# Altium PCB iso_simucam.PcbDoc (part 4 of 4)
Units mil, origin at the board's own origin, x right, y up, seen from the top; angles counter-clockwise.
Board outline 2600 x 5120 mil, 2 copper layers (Top Layer, Bottom Layer); 384 components, 206 nets, 1336 pads, 508 vias.
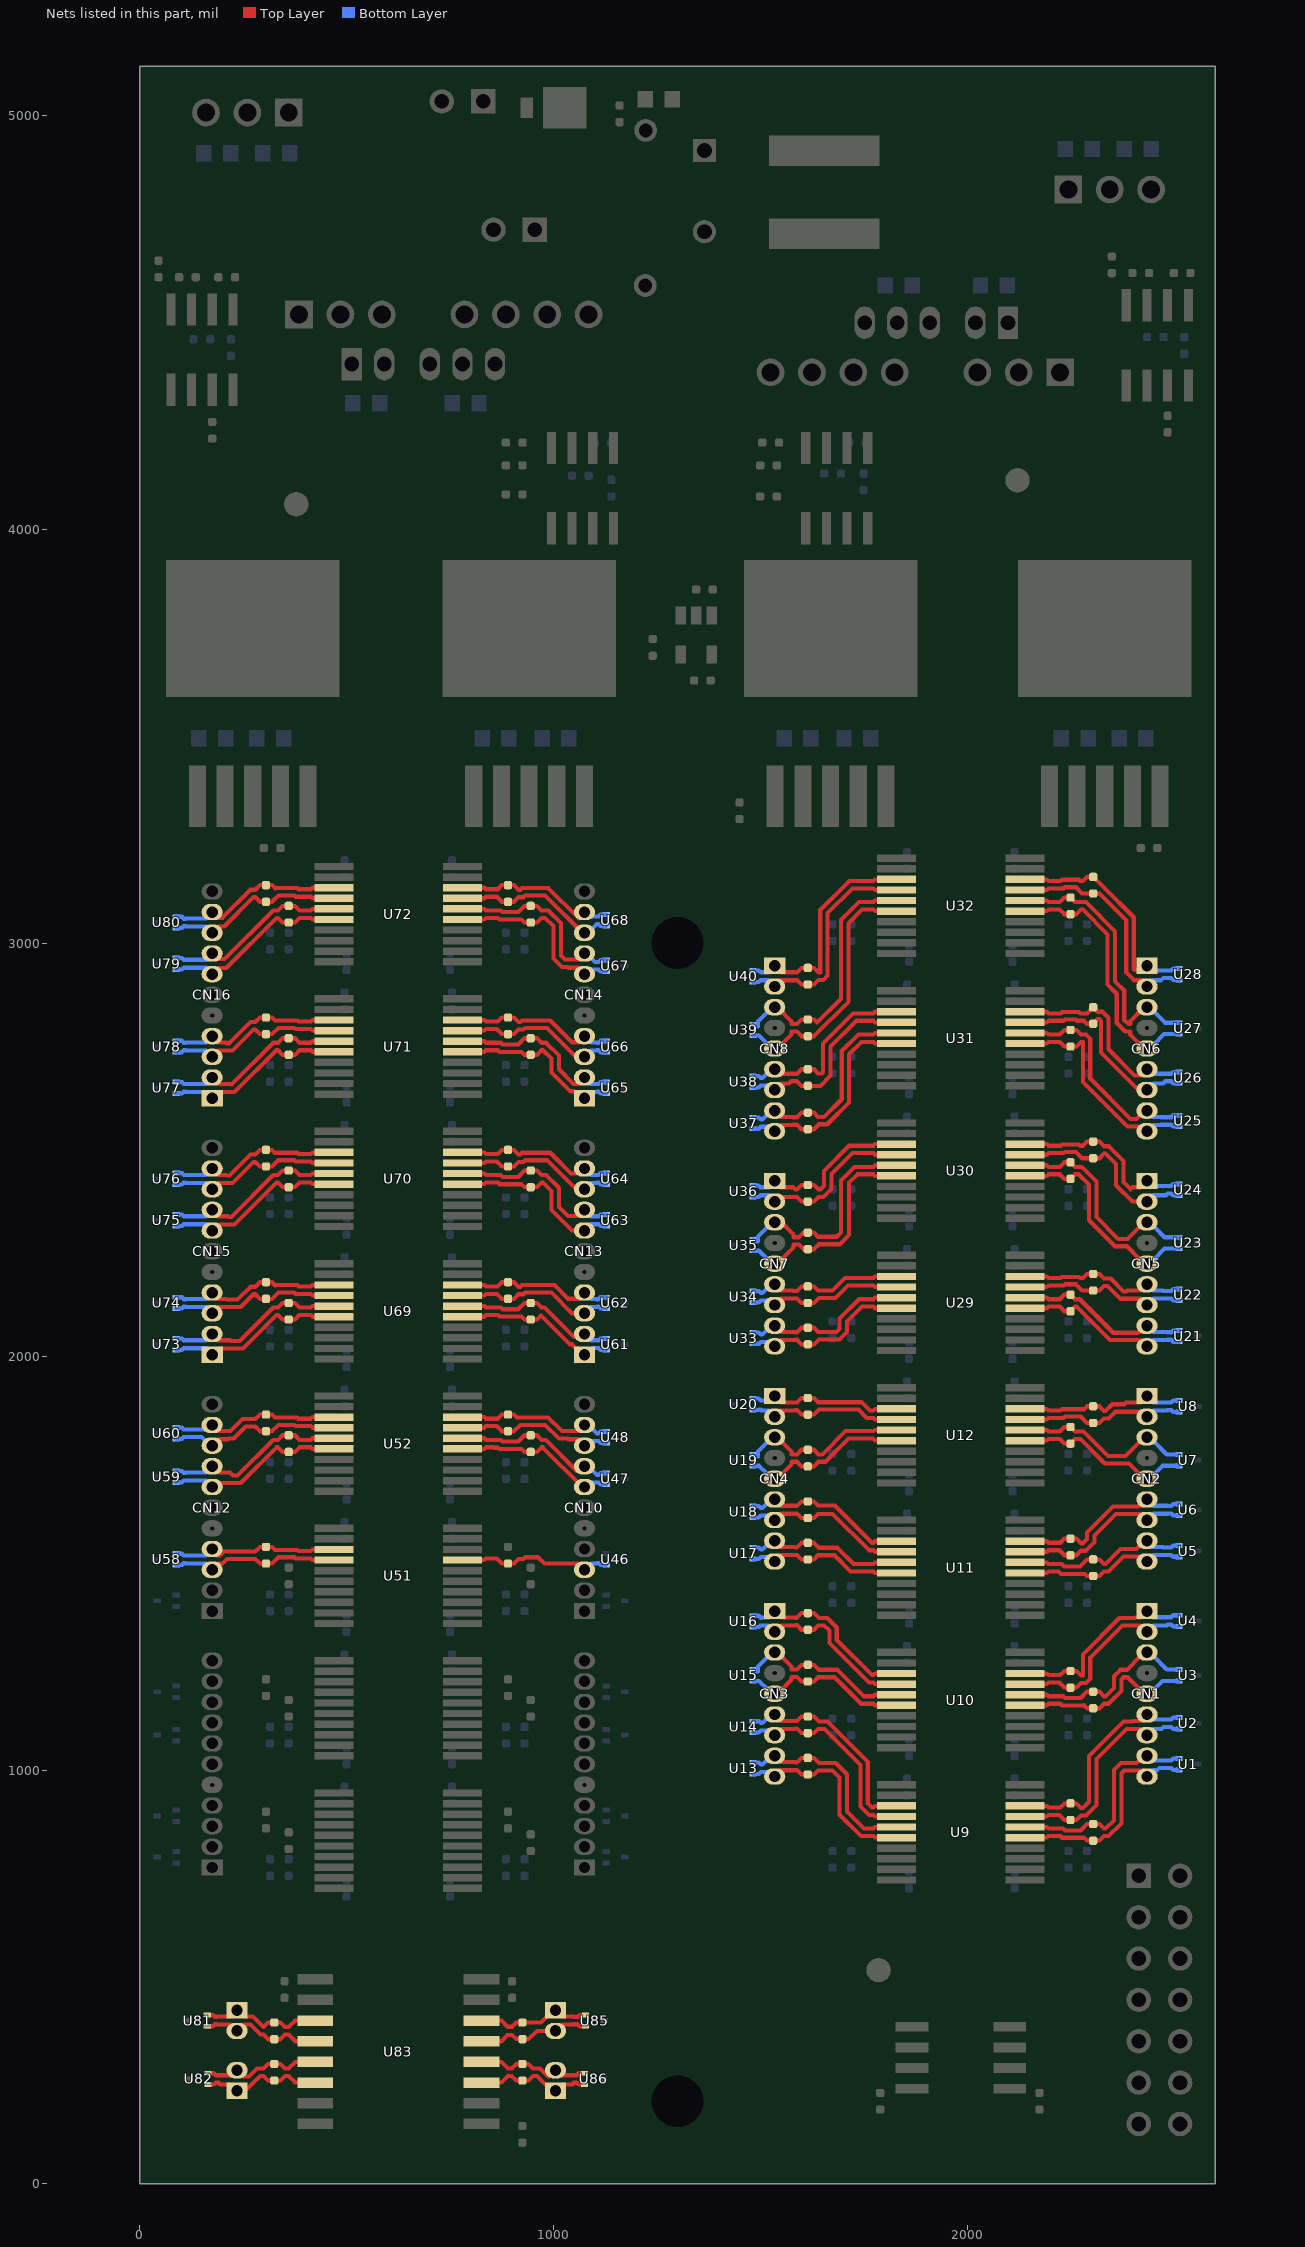
[diagram p4: the nets of this part, all layers, seen from the top]

## Via types
v1: diameter 30, hole 15, Top Layer to Bottom Layer, tented both sides, 508 vias

## Nets (pads, with @x,y where several pads share a name; then routed paths per layer and width w, separated by ;. In a path a pad name is that pad's centre, name@x,y a point inside that pad or via, vN(x,y) a via of type N, cw(c..) or ccw(c..) an arc to the next point about the centre after c; other vN are vias at no path point) (continued)
RX6_ISO_P: CN10.3 R38.2 U46.1 U51.7 | length 380.9
  Top Layer w10: U51.7@780.51,1508.39 832.76,1508.39 836.55,1512.18 862.9,1512.18 875.16,1499.92 R38.2@890,1499.92 904.84,1499.92 915.92,1511 927.71,1511 931.83,1515.12 963.09,1515.12 978.21,1500 1060,1500 CN10.3@1075,1485
  Bottom Layer w10: CN10.3@1075,1485 1090.32,1500.32 1104.32,1500.32 1105,1501 1108.72,1501 1113.5,1496.22 U46.1@1127.36,1496.22
RX6_N: CN12.4 R46.1 U51.13 U58.1 | length 413
  Top Layer w10: CN12.4@175,1535 187.27,1522.73 187.27,1519.68 194.23,1519.68 203.54,1529 279.08,1529 290.16,1540.08 R46.1@305,1540.08 319.84,1540.08 327.19,1532.73 327.58,1533.12 380.63,1533.12 383.57,1530.18 413.45,1530.18 417.24,1533.98 U51.13@469.49,1533.98
  Bottom Layer w10: U58.1@87.64,1523.78 101.5,1523.78 106.28,1519 110,1519 110.68,1519.68 159.68,1519.68 CN12.4@175,1535
RX6_P: CN12.3 R46.2 U51.14 U58.2 | length 419.9
  Top Layer w10: CN12.3@179.96,1485 CN12.3@175,1485 190,1500 200,1500 211,1511 279.08,1511 290.16,1499.92 R46.2@305,1499.92 319.84,1499.92 335.04,1515.12 373.17,1515.12 376.11,1512.18 413.45,1512.18 417.24,1508.39 U51.14@469.49,1508.39
  Bottom Layer w10: U58.2@87.64,1496.22 101.5,1496.22 106.28,1501 110,1501 110.68,1500.32 159.68,1500.32 CN12.3@175,1485
RX7_ISO_N: CN10.8 R39.1 U47.2 U52.6 | length 422.3
  Top Layer w10: U52.6@780.51,1802.8 832.76,1802.8 836.55,1799 872.71,1799 876.83,1794.88 914.96,1794.88 930.16,1810.08 R39.1@945,1810.08 959.84,1810.08 970.92,1799 981.5,1799 1056.25,1724.25 1064.25,1724.25 CN10.8@1075,1735
  Bottom Layer w10: CN10.8@1064.25,1724.25 CN10.8@1075,1735 1084,1735 1105,1714 1108.72,1714 1113.5,1718.78 U47.2@1127.36,1718.78
RX7_ISO_P: CN10.7 R39.2 U47.1 U52.5 | length 403.9
  Top Layer w10: U52.5@780.51,1777.2 832.76,1777.2 836.55,1781 855,1781 856,1780 866.25,1780 869.37,1776.88 923.2,1776.88 930.16,1769.92 R39.2@945,1769.92 959.84,1769.92 970.92,1781 974.04,1781 1070.04,1685 CN10.7@1075,1685
  Bottom Layer w10: CN10.7@1075,1685 1086,1696 1108.72,1696 1113.5,1691.22 U47.1@1127.36,1691.22
RX7_N: CN12.8 R47.1 U52.15 U59.1 | length 445.9
  Top Layer w10: CN12.8@175,1735 190.32,1719.68 218.32,1719.68 225,1713 236.54,1713 322.54,1799 334.08,1799 345.16,1810.08 R47.1@360,1810.08 374.84,1810.08 385.92,1799 413.45,1799 417.24,1802.8 U52.15@469.49,1802.8
  Bottom Layer w10: U59.1@87.64,1723.78 101.5,1723.78 106.28,1719 110,1719 110.68,1719.68 159.68,1719.68 CN12.8@175,1735
RX7_P: CN12.7 R47.2 U52.16 U59.2 | length 441
  Top Layer w10: CN12.7@175,1685 185,1695 244,1695 330,1781 334.08,1781 345.16,1769.92 R47.2@360,1769.92 374.84,1769.92 385.92,1781 413.45,1781 417.24,1777.2 U52.16@469.49,1777.2
  Bottom Layer w10: U59.2@87.64,1696.22 101.5,1696.22 106.28,1701 110,1701 110.68,1700.32 159.68,1700.32 CN12.7@175,1685
RX8_ISO_N: CN10.10 R40.1 U48.2 U52.8 | length 386
  Top Layer w10: U52.8@780.51,1853.98 832.76,1853.98 836.55,1850.18 865.26,1850.18 875.16,1860.08 R40.1@890,1860.08 904.84,1860.08 911.8,1853.12 987.34,1853.12 1020.46,1820 1060,1820 CN10.10@1075,1835
  Bottom Layer w10: CN10.10@1075,1835 1084,1835 1105,1814 1108.72,1814 1113.5,1818.78 U48.2@1127.36,1818.78
RX8_ISO_P: CN10.9 R40.2 U48.1 U52.7 | length 387.1
  Top Layer w10: U52.7@780.51,1828.39 832.76,1828.39 836.55,1832.18 862.9,1832.18 875.16,1819.92 R40.2@890,1819.92 904.84,1819.92 920.04,1835.12 979.88,1835.12 1013,1802 1035,1802 1036.68,1800.32 1059.68,1800.32 CN10.9@1075,1785
  Bottom Layer w10: CN10.9@1075,1785 1086,1796 1108.72,1796 1113.5,1791.22 U48.1@1127.36,1791.22
RX8_N: CN12.10 R48.1 U52.13 U60.1 | length 417.2
  Top Layer w10: CN12.10@175,1835 190,1820 219.54,1820 248.54,1849 279.08,1849 290.16,1860.08 R48.1@305,1860.08 319.84,1860.08 327.19,1852.73 327.58,1853.12 380.63,1853.12 383.57,1850.18 413.45,1850.18 417.24,1853.98 U52.13@469.49,1853.98
  Bottom Layer w10: U60.1@87.64,1828.78 101.5,1828.78 106.28,1824 164,1824 CN12.10@175,1835
RX8_P: CN12.9 R48.2 U52.14 U60.2 | length 425.3
  Top Layer w10: CN12.9@175,1785 190.32,1800.32 213.32,1800.32 215,1802 227,1802 256,1831 279.08,1831 290.16,1819.92 R48.2@305,1819.92 319.84,1819.92 335.04,1835.12 373.17,1835.12 376.11,1832.18 413.45,1832.18 417.24,1828.39 U52.14@469.49,1828.39
  Bottom Layer w10: U60.2@87.64,1801.22 101.5,1801.22 106.28,1806 149.04,1806 170.04,1785 CN12.9@175,1785
RX9_ISO_N: CN13.2 R49.1 U61.2 U69.6 | length 405.5
  Top Layer w10: U69.6@780.51,2122.36 832.76,2122.36 836.55,2118.57 873.14,2118.57 876.83,2114.88 914.96,2114.88 930.16,2130.08 R49.1@945,2130.08 959.84,2130.08 970.92,2119 978.38,2119 1049.38,2048 1057.46,2048 1062.73,2042.73 CN13.2@1075,2055
  Bottom Layer w10: CN13.2@1075,2055 1090.31,2039.69 1109.41,2039.69 1113.5,2043.78 U61.2@1127.36,2043.78
RX9_ISO_P: CN13.1 R49.2 U61.1 U69.5 | length 401.9
  Top Layer w10: U69.5@780.51,2096.77 832.76,2096.77 836.55,2100.57 865.69,2100.57 869.37,2096.88 923.2,2096.88 930.16,2089.92 R49.2@945,2089.92 959.84,2089.92 969.96,2100.04 1040,2030 ; 1041.92,2030 1045.04,2030 1054.73,2020.32 1059.68,2020.32 CN13.1@1075,2005
  Bottom Layer w10: CN13.1@1077.48,2002.52 1096.3,2021.34 1104.66,2021.34 1105,2021 1108.72,2021 1113.5,2016.22 U61.1@1127.36,2016.22
RX9_N: CN15.2 R57.1 U69.15 U73.1 | length 442
  Top Layer w10: CN15.2@175,2055 190.31,2039.69 218.31,2039.69 220,2038 241.54,2038 322.54,2119 334.08,2119 345.16,2130.08 R57.1@360,2130.08 374.84,2130.08 386.35,2118.57 413.45,2118.57 417.24,2122.36 U69.15@469.49,2122.36
  Bottom Layer w10: U73.1@87.64,2043.78 101.5,2043.78 106.28,2039 110,2039 110.69,2039.69 159.69,2039.69 CN15.2@175,2055
RX9_P: CN15.1 R57.2 U69.16 U73.2 | length 440.8
  Top Layer w10: CN15.1@175,2005 190,2020 249,2020 330,2101 334.08,2101 345.16,2089.92 R57.2@360,2089.92 374.84,2089.92 385.49,2100.57 413.45,2100.57 417.24,2096.77 U69.16@469.49,2096.77
  Bottom Layer w10: U73.2@87.64,2016.22 101.5,2016.22 106.28,2021 110,2021 110.68,2020.32 159.68,2020.32 CN15.1@175,2005
RX10_ISO_N: CN13.4 R50.1 U62.2 U69.8 | length 387.3
  Top Layer w10: U69.8@780.51,2173.54 832.76,2173.54 836.55,2169.75 864.83,2169.75 875.16,2180.08 R50.1@890,2180.08 904.84,2180.08 915.92,2169 920.25,2169 924.37,2173.12 1002.34,2173.12 1035.23,2140.23 1060.23,2140.23 CN13.4@1075,2155
  Bottom Layer w10: CN13.4@1075,2155 1090.32,2139.68 1104.32,2139.68 1105,2139 1108.72,2139 1113.5,2143.78 U62.2@1127.36,2143.78
RX10_ISO_P: CN13.3 R50.2 U62.1 U69.7 | length 389
  Top Layer w10: U69.7@780.51,2147.95 832.76,2147.95 836.55,2151.75 863.33,2151.75 875.16,2139.92 R50.2@890,2139.92 904.84,2139.92 915.92,2151 927.71,2151 931.83,2155.12 994.88,2155.12 1045,2105 CN13.3@1075,2105
  Bottom Layer w10: CN13.3@1075,2105 1090.32,2120.32 1104.32,2120.32 1105,2121 1108.72,2121 1113.5,2116.22 U62.1@1127.36,2116.22
RX10_N: CN15.4 R58.1 U69.13 U74.1 | length 421.1
  Top Layer w10: CN15.4@175,2155 190.32,2139.68 208.32,2139.68 210,2138 236.54,2138 267.54,2169 279.08,2169 290.16,2180.08 R58.1@305,2180.08 319.84,2180.08 327.19,2172.73 327.58,2173.12 380.63,2173.12 384,2169.75 413.45,2169.75 417.24,2173.54 U69.13@469.49,2173.54
  Bottom Layer w10: U74.1@87.64,2143.78 101.5,2143.78 106.28,2139 110,2139 110.68,2139.68 159.68,2139.68 CN15.4@175,2155
RX10_P: CN15.3 R58.2 U69.14 U74.2 | length 423.4
  Top Layer w10: CN15.3@175,2105 190,2120 244,2120 275,2151 279.08,2151 290.16,2139.92 R58.2@305,2139.92 319.84,2139.92 335.04,2155.12 373.17,2155.12 376.54,2151.75 413.45,2151.75 417.24,2147.95 U69.14@469.49,2147.95
  Bottom Layer w10: U74.2@87.64,2116.22 101.5,2116.22 106.28,2121 110,2121 110.68,2120.32 159.68,2120.32 CN15.3@175,2105
RX11_ISO_N: CN13.8 R51.1 U63.2 U70.6 | length 444.1
  Top Layer w10: U70.6@780.51,2442.8 832.76,2442.8 836.55,2439 872.71,2439 876.83,2434.88 914.96,2434.88 930.16,2450.08 R51.1@945,2450.08 959.84,2450.08 970.92,2439 982.46,2439 1013,2408.46 1013,2362 1035,2340 1060,2340 CN13.8@1075,2355
  Bottom Layer w10: CN13.8@1075,2355 1090.32,2339.68 1104.32,2339.68 1105,2339 1108.72,2339 1113.5,2343.78 U63.2@1127.36,2343.78
RX11_ISO_P: CN13.7 R51.2 U63.1 U70.5 | length 441.5
  Top Layer w10: U70.5@780.51,2417.2 832.76,2417.2 836.55,2421 865.25,2421 869.37,2416.88 923.2,2416.88 930.16,2409.92 R51.2@945,2409.92 959.84,2409.92 970.92,2421 975,2421 995,2401 995,2354.54 1044.54,2305 CN13.7@1075,2305
  Bottom Layer w10: CN13.7@1075,2305 1090.32,2320.32 1104.32,2320.32 1105,2321 1108.72,2321 1113.5,2316.22 U63.1@1127.36,2316.22
RX11_N: CN15.8 R59.1 U70.15 U75.1 | length 450.1
  Top Layer w10: CN15.8@175,2355 190.32,2339.68 213.32,2339.68 215,2338 221.54,2338 322.54,2439 334.08,2439 345.16,2450.08 R59.1@360,2450.08 374.84,2450.08 385.92,2439 413.45,2439 417.24,2442.8 U70.15@469.49,2442.8
  Bottom Layer w10: U75.1@87.64,2343.78 101.5,2343.78 106.28,2339 110,2339 110.68,2339.68 159.68,2339.68 CN15.8@175,2355
RX11_P: CN15.7 R59.2 U70.16 U75.2 | length 449.3
  Top Layer w10: CN15.7@175,2305 190,2320 229,2320 330,2421 334.08,2421 345.16,2409.92 R59.2@360,2409.92 374.84,2409.92 385.92,2421 413.45,2421 417.24,2417.2 U70.16@469.49,2417.2
  Bottom Layer w10: U75.2@87.64,2316.22 101.5,2316.22 106.28,2321 110,2321 110.68,2320.32 159.68,2320.32 CN15.7@175,2305
RX12_ISO_N: CN13.10 R52.1 U64.2 U70.8 | length 393.4
  Top Layer w10: U70.8@780.51,2493.98 832.76,2493.98 836.55,2490.18 865.26,2490.18 875.16,2500.08 R52.1@890,2500.08 904.84,2500.08 915.92,2489 920.25,2489 924.37,2493.12 992.34,2493.12 1042.73,2442.73 1062.73,2442.73 CN13.10@1075,2455
  Bottom Layer w10: CN13.10@1075,2455 1090.32,2439.68 1104.32,2439.68 1105,2439 1108.72,2439 1113.5,2443.78 U64.2@1127.36,2443.78
RX12_ISO_P: CN13.9 R52.2 U64.1 U70.7 | length 397.4
  Top Layer w10: U70.7@780.51,2468.39 832.76,2468.39 836.55,2472.18 862.9,2472.18 875.16,2459.92 R52.2@890,2459.92 904.84,2459.92 915.92,2471 927.71,2471 931.83,2475.12 984.88,2475.12 1055,2405 CN13.9@1075,2405
  Bottom Layer w10: CN13.9@1075,2405 1090.32,2420.32 1104.32,2420.32 1105,2421 1108.72,2421 1113.5,2416.22 U64.1@1127.36,2416.22
RX12_N: CN15.10 R60.1 U70.13 U76.1 | length 429.2
  Top Layer w10: CN15.10@175,2455 190.32,2439.68 208.32,2439.68 210,2438 216.54,2438 267.54,2489 279.08,2489 290.16,2500.08 R60.1@305,2500.08 319.84,2500.08 327.19,2492.73 327.58,2493.12 380.63,2493.12 383.57,2490.18 413.45,2490.18 417.24,2493.98 U70.13@469.49,2493.98
  Bottom Layer w10: U76.1@87.64,2443.78 101.5,2443.78 106.28,2439 110,2439 110.68,2439.68 159.68,2439.68 CN15.10@175,2455
RX12_P: CN15.9 R60.2 U70.14 U76.2 | length 431.5
  Top Layer w10: CN15.9@175,2405 190,2420 224,2420 275,2471 279.08,2471 290.16,2459.92 R60.2@305,2459.92 319.84,2459.92 335.04,2475.12 373.17,2475.12 376.11,2472.18 413.45,2472.18 417.24,2468.39 U70.14@469.49,2468.39
  Bottom Layer w10: U76.2@87.64,2416.22 101.5,2416.22 106.28,2421 110,2421 110.68,2420.32 159.68,2420.32 CN15.9@175,2405
RX13_ISO_N: CN14.2 R53.1 U65.2 U71.6 | length 436.1
  Top Layer w10: U71.6@780.51,2762.8 832.76,2762.8 836.55,2759 872.71,2759 876.83,2754.88 914.96,2754.88 930.16,2770.08 R53.1@945,2770.08 959.84,2770.08 970.92,2759 982.46,2759 1013,2728.46 1013,2695 1048.31,2659.69 1059.69,2659.69 CN14.2@1075,2675
  Bottom Layer w10: CN14.2@1075,2675 1090.31,2659.69 1109.41,2659.69 1113.5,2663.78 U65.2@1127.36,2663.78
RX13_ISO_P: CN14.1 R53.2 U65.1 U71.5 | length 433.9
  Top Layer w10: U71.5@780.51,2737.2 832.76,2737.2 836.55,2741 865.25,2741 869.37,2736.88 923.2,2736.88 930.16,2729.92 R53.2@945,2729.92 959.84,2729.92 970.92,2741 975,2741 995,2721 995,2687.54 1040.86,2641.69 1048.31,2641.69 1065,2625 CN14.1@1075,2625
  Bottom Layer w10: CN14.1@1075,2625 1090.32,2640.32 1104.32,2640.32 1105,2641 1108.72,2641 1113.5,2636.22 U65.1@1127.36,2636.22
RX13_N: CN16.2 R61.1 U71.15 U77.1 | length 450.1
  Top Layer w10: CN16.2@175,2675 190.31,2659.69 218.31,2659.69 220,2658 221.54,2658 322.54,2759 334.08,2759 345.16,2770.08 R61.1@360,2770.08 374.84,2770.08 385.92,2759 413.45,2759 417.24,2762.8 U71.15@469.49,2762.8
  Bottom Layer w10: U77.1@87.64,2663.78 101.5,2663.78 106.28,2659 110,2659 110.69,2659.69 159.69,2659.69 CN16.2@175,2675
RX13_P: CN16.1 R61.2 U71.16 U77.2 | length 449.3
  Top Layer w10: CN16.1@175,2625 190,2640 229,2640 330,2741 334.08,2741 345.16,2729.92 R61.2@360,2729.92 374.84,2729.92 385.92,2741 413.45,2741 417.24,2737.2 U71.16@469.49,2737.2
  Bottom Layer w10: U77.2@87.64,2636.22 101.5,2636.22 106.28,2641 110,2641 110.68,2640.32 159.68,2640.32 CN16.1@175,2625
RX14_ISO_N: CN14.4 R54.1 U66.2 U71.8 | length 395.5
  Top Layer w10: U71.8@780.51,2813.98 832.76,2813.98 836.55,2810.18 865.26,2810.18 875.16,2820.08 R54.1@890,2820.08 904.84,2820.08 915.92,2809 920.25,2809 924.37,2813.12 992.34,2813.12 1045.23,2760.23 1060.23,2760.23 CN14.4@1075,2775
  Bottom Layer w10: CN14.4@1075,2775 1090.32,2759.68 1104.32,2759.68 1105,2759 1108.72,2759 1113.5,2763.78 U66.2@1127.36,2763.78
RX14_ISO_P: CN14.3 R54.2 U66.1 U71.7 | length 397.4
  Top Layer w10: U71.7@780.51,2788.39 832.76,2788.39 836.55,2792.18 862.9,2792.18 875.16,2779.92 R54.2@890,2779.92 904.84,2779.92 915.92,2791 927.71,2791 931.83,2795.12 984.88,2795.12 1055,2725 CN14.3@1075,2725
  Bottom Layer w10: CN14.3@1075,2725 1090.32,2740.32 1104.32,2740.32 1105,2741 1108.72,2741 1113.5,2736.22 U66.1@1127.36,2736.22
RX14_N: CN16.4 R62.1 U71.13 U78.1 | length 429.2
  Top Layer w10: CN16.4@175,2775 190.32,2759.68 208.32,2759.68 210,2758 216.54,2758 267.54,2809 279.08,2809 290.16,2820.08 R62.1@305,2820.08 319.84,2820.08 327.19,2812.73 327.58,2813.12 380.63,2813.12 383.57,2810.18 413.45,2810.18 417.24,2813.98 U71.13@469.49,2813.98
  Bottom Layer w10: U78.1@87.64,2763.78 101.5,2763.78 106.28,2759 110,2759 110.68,2759.68 159.68,2759.68 CN16.4@175,2775
RX14_P: CN16.3 R62.2 U71.14 U78.2 | length 431.5
  Top Layer w10: CN16.3@175,2725 190,2740 224,2740 275,2791 279.08,2791 290.16,2779.92 R62.2@305,2779.92 319.84,2779.92 335.04,2795.12 373.17,2795.12 376.11,2792.18 413.45,2792.18 417.24,2788.39 U71.14@469.49,2788.39
  Bottom Layer w10: U78.2@87.64,2736.22 101.5,2736.22 106.28,2741 110,2741 110.68,2740.32 159.68,2740.32 CN16.3@175,2725
RX15_ISO_N: CN14.8 R55.1 U67.2 U72.6 | length 471.7
  Top Layer w10: U72.6@780.51,3082.8 832.76,3082.8 836.55,3079 872.71,3079 876.83,3074.88 914.96,3074.88 930.16,3090.08 R55.1@945,3090.08 959.84,3090.08 970.92,3079 987.46,3079 1018,3048.46 1018,2970 1028,2960 1060,2960 CN14.8@1075,2975
  Bottom Layer w10: CN14.8@1077.48,2977.48 1100.96,2954 1108.72,2954 1113.5,2958.78 U67.2@1127.36,2958.78
RX15_ISO_P: CN14.7 R55.2 U67.1 U72.5 | length 466.4
  Top Layer w10: U72.5@780.51,3057.2 832.76,3057.2 836.55,3061 865.25,3061 869.37,3056.88 923.2,3056.88 930.16,3049.92 R55.2@945,3049.92 959.84,3049.92 970.92,3061 980,3061 1000,3041 1000,2962.54 1020.54,2942 1035,2942 1036.68,2940.32 1059.68,2940.32 CN14.7@1075,2925
  Bottom Layer w10: CN14.7@1075,2925 1086,2936 1108.72,2936 1113.5,2931.22 U67.1@1127.36,2931.22
RX15_N: CN16.8 R63.1 U72.15 U79.1 | length 455.5
  Top Layer w10: CN16.8@175,2975 188.54,2961.46 205,2961.46 322.54,3079 334.08,3079 345.16,3090.08 R63.1@360,3090.08 374.84,3090.08 385.92,3079 413.45,3079 417.24,3082.8 U72.15@469.49,3082.8
  Bottom Layer w10: U79.1@87.64,2963.78 101.5,2963.78 106.28,2959 110,2959 110.68,2959.68 159.68,2959.68 CN16.8@175,2975
RX15_P: CN16.7 R63.2 U72.16 U79.2 | length 457.5
  Top Layer w10: CN16.7@175,2925 190,2940 209,2940 330,3061 334.08,3061 345.16,3049.92 R63.2@360,3049.92 374.84,3049.92 385.92,3061 413.45,3061 417.24,3057.2 U72.16@469.49,3057.2
  Bottom Layer w10: U79.2@87.64,2936.22 101.5,2936.22 106.28,2941 110,2941 110.68,2940.32 159.68,2940.32 CN16.7@175,2925
RX16_ISO_N: CN14.10 R56.1 U68.2 U72.8 | length 401.7
  Top Layer w10: U72.8@780.51,3133.98 832.76,3133.98 836.55,3130.18 865.26,3130.18 875.16,3140.08 R56.1@890,3140.08 904.84,3140.08 915.92,3129 920.25,3129 924.37,3133.12 987.34,3133.12 1060.23,3060.23 CN14.10@1075,3075
  Bottom Layer w10: CN14.10@1075,3075 1086,3064 1108.72,3064 1113.5,3068.78 U68.2@1127.36,3068.78
RX16_ISO_P: CN14.9 R56.2 U68.1 U72.7 | length 407.8
  Top Layer w10: U72.7@780.51,3108.39 832.76,3108.39 836.55,3112.18 862.9,3112.18 875.16,3099.92 R56.2@890,3099.92 904.84,3099.92 915.92,3111 927.71,3111 931.83,3115.12 979.88,3115.12 1070,3025 CN14.9@1075,3025
  Bottom Layer w10: CN14.9@1075,3025 1084,3025 1105,3046 1108.72,3046 1113.5,3041.22 U68.1@1127.36,3041.22
RX16_N: CN16.10 R64.1 U72.13 U80.1 | length 434.6
  Top Layer w10: CN16.10@175,3075 188.54,3061.46 200,3061.46 267.54,3129 279.08,3129 290.16,3140.08 R64.1@305,3140.08 319.84,3140.08 327.19,3132.73 327.58,3133.12 380.63,3133.12 383.57,3130.18 413.45,3130.18 417.24,3133.98 U72.13@469.49,3133.98
  Bottom Layer w10: U80.1@87.64,3063.78 101.5,3063.78 106.28,3059 110,3059 110.68,3059.68 159.68,3059.68 CN16.10@175,3075
RX16_P: CN16.9 R64.2 U72.14 U80.2 | length 439.8
  Top Layer w10: CN16.9@175,3025 190,3040 204,3040 275,3111 279.08,3111 290.16,3099.92 R64.2@305,3099.92 319.84,3099.92 335.04,3115.12 373.17,3115.12 376.11,3112.18 413.45,3112.18 417.24,3108.39 U72.14@469.49,3108.39
  Bottom Layer w10: U80.2@87.64,3036.22 101.5,3036.22 106.28,3041 110,3041 110.68,3040.32 159.68,3040.32 CN16.9@175,3025
SI_I_ISO_N: CN21.2 R69.2 U83.12 U86.1 | length 286.4
  Top Layer w10: U83.12@825.79,295 874.09,295 890.09,279 899.08,279 910.16,290.08 R69.2@925,290.08 939.84,290.08 950.92,279 967.46,279 986.77,259.69 989.69,259.69 CN21.2@1005,275 1017.22,262.78 1056.36,262.78 1061.14,267.56 U86.1@1075,267.56
SI_I_ISO_P: CN21.1 R69.1 U83.11 U86.2 | length 290.7
  Top Layer w10: U83.11@825.79,245 874.09,245 890.09,261 899.08,261 910.16,249.92 R69.1@925,249.92 939.84,249.92 950.92,261 960,261 970,251 970,250 971,250 996,225 CN21.1@1005,225 1020.32,240.32 1045.54,240.32 1050,244.78 1056.36,244.78 1061.14,240 U86.2@1075,240
SI_O_N: CN18.2 R66.2 U82.2 U83.5 | length 296.5
  Top Layer w10: U82.2@165,267.56 178.86,267.56 183.64,262.78 222.78,262.78 CN18.2@235,275 250.31,259.69 264.23,259.69 283.62,279.08 299.08,279.08 310.16,290.16 R66.2@325,290.16 339.84,290.16 351,279 359.91,279 375.91,295 U83.5@424.21,295
SI_O_P: CN18.1 R66.1 U82.1 U83.6 | length 300.1
  Top Layer w10: U82.1@165,240 178.86,240 183.64,244.78 190,244.78 194.46,240.32 219.68,240.32 CN18.1@235,225 254.02,225 270.71,241.69 271.69,241.69 291.08,261.08 299.08,261.08 310.16,250 R66.1@325,250 339.84,250 350.84,261 359.91,261 375.91,245 U83.6@424.21,245
SO_I_N: CN17.2 R65.1 U81.1 U83.4 | length 302.4
  Top Layer w10: U81.1@162.64,381.22 176.5,381.22 181.28,386 185,386 185.69,385.31 219.69,385.31 CN17.2@235,370 250.31,385.31 267.31,385.31 291.62,361 299.08,361 310.16,349.92 R65.1@325,349.92 339.84,349.92 350.92,361 359.91,361 375.91,345 U83.4@424.21,345
SO_I_P: CN17.1 R65.2 U81.2 U83.3 | length 303
  Top Layer w10: U81.2@162.64,408.78 176.5,408.78 181.28,404 185,404 185.68,404.68 219.68,404.68 CN17.1@235,420 250,405 273.08,405 299.08,379 310.16,390.08 R65.2@325,390.08 339.84,390.08 350.92,379 359.91,379 375.91,395 U83.3@424.21,395
SO_O_ISO_N: CN20.2 R68.1 U83.13 U85.2 | length 278.8
  Top Layer w10: U83.13@825.79,345 874.09,345 889.09,360 900.16,360 910.16,350 R68.1@925,350 939.84,350 959.84,370 CN20.2@1005,370 1020.31,385.31 1049.31,385.31 1050,386 1058.72,386 1063.5,381.22 U85.2@1077.36,381.22
SO_O_ISO_P: CN20.1 R68.2 U83.14 U85.1 | length 283
  Top Layer w10: U83.14@825.79,395 874.09,395 889.09,380 900,380 910.16,390.16 R68.2@925,390.16 970.2,390.16 1000.04,420 CN20.1@1005,420 1020.32,404.68 1049.32,404.68 1050,404 1058.72,404 1063.5,408.78 U85.1@1077.36,408.78
TX1_ISO_N: CN3.8 R9.1 U9.15 U13.1 | length 494.2
  Top Layer w10: CN3.8@1535,1035 1550.32,1019.68 1584.32,1019.68 1585,1019 1589.08,1019 1600.16,1030.08 R9.1@1615,1030.08 1629.84,1030.08 1641.92,1018 1682.46,1018 1710,990.46 1710,900 1751,859 1773.45,859 1777.24,862.8 U9.15@1829.49,862.8
  Bottom Layer w10: U13.1@1482.64,1018.78 1496.5,1018.78 1501.28,1014 1505,1014 1526,1035 CN3.8@1535,1035
TX1_ISO_P: CN3.9 R9.2 U9.16 U13.2 | length 489.2
  Top Layer w10: CN3.9@1535,985 1550.32,1000.32 1584.31,1000.32 1585,1001 1589.08,1001 1600.16,989.92 R9.2@1615,989.92 1629.84,989.92 1639.92,1000 1675,1000 1692,983 1692,892.54 1743.54,841 1773.45,841 1777.24,837.2 U9.16@1829.49,837.2
  Bottom Layer w10: U13.2@1482.64,991.22 1496.5,991.22 1501.28,996 1524,996 CN3.9@1535,985
TX1_N: CN1.8 R1.1 U1.2 U9.6 | length 536.6
  Top Layer w10: U9.6@2140.51,862.8 2192.76,862.8 2196.55,859 2232.71,859 2236.83,854.88 2274.96,854.88 2290.16,870.08 R1.1@2305,870.08 2319.84,870.08 2330.92,859 2335,859 2355,879 2355,1000.46 2372.54,1018 2410,1018 2427,1035 CN1.8@2435,1035
  Bottom Layer w10: CN1.8@2435,1035 2446,1024 2493.72,1024 2498.5,1028.78 U1.2@2512.36,1028.78
TX1_P: CN1.9 R1.2 U1.1 U9.5 | length 536.8
  Top Layer w10: U9.5@2140.51,837.2 2192.76,837.2 2196.55,841 2225.25,841 2229.37,836.88 2282.42,836.88 2282.81,837.27 2290.16,829.92 R1.2@2305,829.92 2319.84,829.92 2330.92,841 2342.46,841 2373,871.54 2373,993 2380,1000 2420,1000 CN1.9@2435,985
  Bottom Layer w10: CN1.9@2435,985 2450.32,1000.32 2459.32,1000.32 2465,1006 2493.72,1006 2498.5,1001.22 U1.1@2512.36,1001.22
TX2_ISO_N: CN3.6 R10.1 U9.13 U14.1 | length 520.1
  Top Layer w10: CN3.6@1535,1135 1550.32,1119.68 1584.32,1119.68 1585,1119 1589.08,1119 1600.16,1130.08 R10.1@1615,1130.08 1629.84,1130.08 1641.92,1118 1662.46,1118 1760,1020.46 1760,920.18 1770,910.18 1773.45,910.18 1777.24,913.98 U9.13@1829.49,913.98
  Bottom Layer w10: U14.1@1482.64,1118.78 1496.5,1118.78 1501.28,1114 1505,1114 1526,1135 CN3.6@1535,1135
TX2_ISO_P: CN3.7 R10.2 U9.14 U14.2 | length 515.2
  Top Layer w10: CN3.7@1535,1085 1550.32,1100.32 1584.31,1100.32 1585,1101 1589.08,1101 1600.16,1089.92 R10.2@1615,1089.92 1629.84,1089.92 1639.92,1100 1655,1100 1742,1013 1742,912.73 1762.54,892.18 1773.45,892.18 1777.24,888.39 U9.14@1829.49,888.39
  Bottom Layer w10: U14.2@1482.64,1091.22 1496.5,1091.22 1501.28,1096 1524,1096 CN3.7@1535,1085
TX2_N: CN1.6 R2.1 U2.2 U9.8 | length 547.8
  Top Layer w10: U9.8@2140.51,913.98 2192.76,913.98 2196.55,910.18 2225.26,910.18 2235.16,920.08 R2.1@2250,920.08 2264.84,920.08 2275.92,909 2280,909 2295,924 2295,1035 2378,1118 2400,1118 2401.68,1119.68 2419.68,1119.68 CN1.6@2435,1135
  Bottom Layer w10: CN1.6@2435,1135 2447.22,1122.78 2493.72,1122.78 2498.5,1127.56 U2.2@2512.36,1127.56
TX2_P: CN1.7 R2.2 U2.1 U9.7 | length 551.1
  Top Layer w10: U9.7@2140.51,888.39 2192.76,888.39 2196.55,892.18 2222.9,892.18 2235.16,879.92 R2.2@2250,879.92 2264.84,879.92 2275.92,891 2287.46,891 2313,916.54 2313,1027.54 2385.46,1100 2420,1100 CN1.7@2435,1085
  Bottom Layer w10: CN1.7@2435,1085 2450.32,1100.32 2470.54,1100.32 2475,1104.78 2493.72,1104.78 2498.5,1100 U2.1@2512.36,1100
TX3_ISO_N: CN3.3 R11.1 U10.15 U15.1 | length 425.5
  Top Layer w10: CN3.3@1535,1285 1541.57,1285 1575.59,1250.98 1575.59,1244.41 1576,1244 1585,1244 ; 1589.08,1244 1600.16,1255.08 R11.1@1615,1255.08 1629.84,1255.08 1641.92,1243 1687,1243 1751,1179 1773.45,1179 1777.24,1182.8 U10.15@1829.49,1182.8
  Bottom Layer w10: U15.1@1482.64,1243.78 1487.64,1238.78 1494.41,1238.78 1494.41,1250.98 1518.43,1275 CN3.3@1535,1275
TX3_ISO_P: CN3.5 R11.2 U10.16 U15.2 | length 409.2
  Top Layer w10: CN3.5@1535,1185 1541.57,1185 1575.59,1219.02 1575.59,1225.59 1576,1226 1585,1226 ; 1589.08,1226 1600.16,1214.92 R11.2@1615,1214.92 1629.84,1214.92 1639.92,1225 1679.54,1225 1743.54,1161 1773.45,1161 1777.24,1157.2 U10.16@1829.49,1157.2
  Bottom Layer w10: U15.2@1482.64,1216.22 1497.21,1216.22 1518.43,1195 CN3.5@1535,1195
TX3_N: CN1.3 R3.1 U3.2 U10.6 | length 455.4
  Top Layer w10: U10.6@2140.51,1182.8 2192.76,1182.8 2196.55,1179 2232.71,1179 2236.83,1174.88 2274.96,1174.88 2290.16,1190.08 R3.1@2305,1190.08 2319.84,1190.08 2330.92,1179 2335,1179 2355,1199 2355,1227.46 2370.54,1243 2386.43,1243 2418.43,1275 CN1.3@2435,1275
  Bottom Layer w10: CN1.3@2435,1275 2451.57,1275 2482.79,1243.78 U3.2@2512.36,1243.78
TX3_P: CN1.5 R3.2 U3.1 U10.5 | length 447.3
  Top Layer w10: U10.5@2140.51,1157.2 2192.76,1157.2 2196.55,1161 2225.25,1161 2229.37,1156.88 2282.42,1156.88 2282.81,1157.27 2290.16,1149.92 R3.2@2305,1149.92 2319.84,1149.92 2330.92,1161 2342.46,1161 2373,1191.54 2373,1220 2378,1225 2388.43,1225 2418.43,1195 CN1.5@2435,1195
  Bottom Layer w10: CN1.5@2435,1195 2451.57,1195 2472.79,1216.22 U3.1@2512.36,1216.22
TX4_ISO_N: CN3.1 R12.1 U10.13 U16.1 | length 447.8
  Top Layer w10: CN3.1@1535,1385 1550.32,1369.68 1584.32,1369.68 1585,1369 1589.08,1369 1600.16,1380.08 R12.1@1615,1380.08 1629.84,1380.08 1641.92,1368 1662,1368 1685,1345 1685,1315.18 1770,1230.18 1773.45,1230.18 1777.24,1233.98 U10.13@1829.49,1233.98
  Bottom Layer w10: U16.1@1482.64,1373.78 1496.5,1373.78 1501.28,1369 1505,1369 1505.68,1369.68 1519.68,1369.68 CN3.1@1535,1385
TX4_ISO_P: CN3.2 R12.2 U10.14 U16.2 | length 446.4
  Top Layer w10: CN3.2@1535,1335 1550.31,1350.31 1584.31,1350.31 1585,1351 1589.08,1351 1600.16,1339.92 R12.2@1615,1339.92 1629.84,1339.92 1639.92,1350 1654.54,1350 1667,1337.54 1667,1307.73 1762.54,1212.18 1773.45,1212.18 1777.24,1208.39 U10.14@1829.49,1208.39
  Bottom Layer w10: U16.2@1482.64,1346.22 1496.5,1346.22 1500.59,1350.31 1519.69,1350.31 CN3.2@1535,1335
TX4_N: CN1.1 R4.1 U4.2 U10.8 | length 484.7
  Top Layer w10: U10.8@2140.51,1233.98 2192.76,1233.98 2196.55,1230.18 2225.26,1230.18 2235.16,1240.08 R4.1@2250,1240.08 2264.84,1240.08 2275.92,1229 2280,1229 2280,1280 2368,1368 2405,1368 2406.68,1369.68 2419.68,1369.68 CN1.1@2435,1385
  Bottom Layer w10: CN1.1@2435,1385 2449.78,1370.22 2493.72,1370.22 2498.5,1375 U4.2@2512.36,1375
TX4_P: CN1.2 R4.2 U4.1 U10.7 | length 485.9
  Top Layer w10: U10.7@2140.51,1208.39 2192.76,1208.39 2196.55,1212.18 2222.9,1212.18 2235.16,1199.92 R4.2@2250,1199.92 2264.84,1199.92 2275.92,1211 2287.46,1211 2298,1221.54 2298,1272.54 2375.46,1350 2420,1350 CN1.2@2435,1335
  Bottom Layer w10: CN1.2@2435,1335 2450.31,1350.31 2483.09,1350.31 2485,1352.22 2493.72,1352.22 2498.5,1347.44 U4.1@2512.36,1347.44
TX5_ISO_N: CN4.8 R13.1 U11.15 U17.1 | length 391.5
  Top Layer w10: CN4.8@1535,1555 1550.32,1539.68 1584.32,1539.68 1585,1539 1589.08,1539 1600.16,1550.08 R13.1@1615,1550.08 1629.84,1550.08 1641.92,1538 1687,1538 1726,1499 1773.45,1499 1777.24,1502.8 U11.15@1829.49,1502.8
  Bottom Layer w10: U17.1@1482.64,1538.78 1496.5,1538.78 1501.28,1534 1505,1534 1526,1555 CN4.8@1535,1555
TX5_ISO_P: CN4.9 R13.2 U11.16 U17.2 | length 386.5
  Top Layer w10: CN4.9@1535,1505 1550.32,1520.32 1584.31,1520.32 1585,1521 1589.08,1521 1600.16,1509.92 R13.2@1615,1509.92 1629.84,1509.92 1639.92,1520 1679.54,1520 1718.54,1481 1773.45,1481 1777.24,1477.2 U11.16@1829.49,1477.2
  Bottom Layer w10: U17.2@1482.64,1511.22 1496.5,1511.22 1501.28,1516 1524,1516 CN4.9@1535,1505
TX5_N: CN2.8 R5.1 U5.2 U11.6 | length 414.4
  Top Layer w10: U11.6@2140.51,1502.8 2192.76,1502.8 2196.55,1499 2228.88,1499 2234.88,1493 2273.08,1493 2290.16,1510.08 R5.1@2305,1510.08 2319.84,1510.08 2330.92,1499 2335,1499 2371,1535 2410,1535 CN2.8@2430,1555
  Bottom Layer w10: CN2.8@2435,1555 2450.32,1539.68 2474.32,1539.68 2475,1539 2493.72,1539 2498.5,1543.78 U5.2@2512.36,1543.78
TX5_P: CN2.9 R5.2 U5.1 U11.5 | length 411.1
  Top Layer w10: U11.5@2140.51,1477.2 2192.76,1477.2 2196.55,1481 2221.43,1481 2227.43,1475 2285.08,1475 2290.16,1469.92 R5.2@2305,1469.92 2319.84,1469.92 2330.92,1481 2342.46,1481 2378.46,1517 2423,1517 CN2.9@2435,1505
  Bottom Layer w10: CN2.9@2435,1505 2450.32,1520.32 2474.32,1520.32 2475,1521 2493.72,1521 2498.5,1516.22 U5.1@2512.36,1516.22
TX6_ISO_N: CN4.6 R14.1 U11.13 U18.1 | length 411.7
  Top Layer w10: CN4.6@1535,1655 1550.32,1639.68 1584.32,1639.68 1585,1639 1589.08,1639 1600.16,1650.08 R14.1@1615,1650.08 1629.84,1650.08 1639.92,1640 1680.18,1640 1770,1550.18 1773.45,1550.18 1777.24,1553.98 U11.13@1829.49,1553.98
  Bottom Layer w10: U18.1@1482.64,1638.78 1496.5,1638.78 1501.28,1634 1505,1634 1526,1655 CN4.6@1535,1655
TX6_ISO_P: CN4.7 R14.2 U11.14 U18.2 | length 406.5
  Top Layer w10: CN4.7@1535,1605 1550.32,1620.32 1584.31,1620.32 1585,1621 1589.08,1621 1600.16,1609.92 R14.2@1615,1609.92 1629.84,1609.92 1639.65,1619.73 1675,1619.73 1762.54,1532.18 1773.45,1532.18 1777.24,1528.39 U11.14@1829.49,1528.39
  Bottom Layer w10: U18.2@1482.64,1611.22 1496.5,1611.22 1501.28,1616 1524,1616 CN4.7@1535,1605
TX6_N: CN2.6 R6.1 U6.2 U11.8 | length 444.3
  Top Layer w10: U11.8@2140.51,1553.98 2192.76,1553.98 2196.55,1550.18 2225.26,1550.18 2235.16,1560.08 R6.1@2250,1560.08 2264.84,1560.08 2275.92,1549 2280,1549 2290,1559 2290,1575.46 2352.54,1638 2413.04,1638 2414.73,1639.68 2419.68,1639.68 CN2.6@2435,1655
  Bottom Layer w10: CN2.6@2435,1655 2450.32,1639.68 2484.32,1639.68 2485,1639 2493.72,1639 2498.5,1643.78 U6.2@2512.36,1643.78
TX6_P: CN2.7 R6.2 U6.1 U11.7 | length 444.4
  Top Layer w10: U11.7@2140.51,1528.39 2192.76,1528.39 2196.55,1532.18 2222.9,1532.18 2235.16,1519.92 R6.2@2250,1519.92 2264.84,1519.92 2275.92,1531 2287.46,1531 2308,1551.54 2308,1568 2360,1620 2420,1620 CN2.7@2435,1605
  Bottom Layer w10: CN2.7@2435,1605 2450.32,1620.32 2484.32,1620.32 2485,1621 2493.72,1621 2498.5,1616.22 U6.1@2512.36,1616.22
TX7_ISO_N: CN4.3 R15.1 U12.15 U19.1 | length 421.4
  Top Layer w10: CN4.3@1535,1805 1541.57,1805 1575.59,1770.98 1575.59,1764.41 1576,1764 1585,1764 ; 1589.08,1764 1600.16,1775.08 R15.1@1615,1775.08 1629.84,1775.08 1640.92,1764 1650,1764 1706,1820 1774.45,1820 1777.24,1822.8 U12.15@1829.49,1822.8
  Bottom Layer w10: U19.1@1482.64,1763.78 1487.64,1758.78 1494.41,1758.78 1494.41,1770.98 1518.43,1795 CN4.3@1535,1795
TX7_ISO_P: CN4.5 R15.2 U12.16 U19.2 | length 406.8
  Top Layer w10: CN4.5@1535,1705 1541.57,1705 1575.59,1739.02 1575.59,1745.59 1576,1746 1585,1746 ; 1589.08,1746 1600.16,1734.92 R15.2@1615,1734.92 1629.84,1734.92 1640.92,1746 1657.46,1746 1713.46,1802 1772.45,1802 1777.24,1797.2 U12.16@1829.49,1797.2
  Bottom Layer w10: U19.2@1482.64,1736.22 1497.21,1736.22 1518.43,1715 CN4.5@1535,1715
TX7_N: CN2.3 R7.1 U7.2 U12.6 | length 434.5
  Top Layer w10: U12.6@2140.51,1822.8 2192.76,1822.8 2196.55,1819 2224.08,1819 2235.16,1830.08 R7.1@2250,1830.08 2261.08,1819 2281.46,1819 2340.46,1760 2383.43,1760 2418.43,1795 CN2.3@2435,1795
  Bottom Layer w10: CN2.3@2435,1795 2451.57,1795 2482.79,1763.78 U7.2@2512.36,1763.78
TX7_P: CN2.5 R7.2 U7.1 U12.5 | length 427
  Top Layer w10: U12.5@2140.51,1797.2 2192.76,1797.2 2196.55,1801 2224.08,1801 2235.16,1789.92 R7.2@2250,1789.92 2261.08,1801 2274,1801 2333,1742 2391.43,1742 2418.43,1715 CN2.5@2435,1715
  Bottom Layer w10: CN2.5@2435,1715 2451.57,1715 2472.79,1736.22 U7.1@2512.36,1736.22
TX8_ISO_N: CN4.1 R16.1 U12.13 U20.1 | length 378.6
  Top Layer w10: CN4.1@1535,1905 1550.32,1889.68 1584.32,1889.68 1585,1889 1589.08,1889 1600.16,1900.08 R16.1@1615,1900.08 1629.84,1900.08 1639.92,1890 1745.18,1890 1765,1870.18 1773.45,1870.18 1777.24,1873.98 U12.13@1829.49,1873.98
  Bottom Layer w10: U20.1@1482.64,1898.78 1496.5,1898.78 1501.28,1894 1524,1894 CN4.1@1535,1905
TX8_ISO_P: CN4.2 R16.2 U12.14 U20.2 | length 380.4
  Top Layer w10: CN4.2@1535,1855 1550.31,1870.31 1584.31,1870.31 1585,1871 1589.08,1871 1600.16,1859.92 R16.2@1615,1859.92 1629.84,1859.92 1641.92,1872 1737.73,1872 1757.54,1852.18 1773.45,1852.18 1777.24,1848.39 U12.14@1829.49,1848.39
  Bottom Layer w10: U20.2@1482.64,1871.22 1496.5,1871.22 1497.53,1872.26 1501.26,1872.26 1503.2,1870.31 1519.69,1870.31 CN4.2@1535,1855
TX8_N: CN2.1 R8.1 U8.2 U12.8 | length 406
  Top Layer w10: U12.8@2140.51,1873.98 2192.76,1873.98 2196.55,1870.18 2226.43,1870.18 2229.37,1873.12 2282.42,1873.12 2282.81,1872.73 2290.16,1880.08 R8.1@2305,1880.08 2319.84,1880.08 2330.92,1869 2335,1869 2351,1885 2380,1885 2384.68,1889.68 2419.68,1889.68 CN2.1@2435,1905
  Bottom Layer w10: CN2.1@2435,1905 2450.32,1889.68 2484.32,1889.68 2485,1889 2493.72,1889 2498.5,1893.78 U8.2@2512.36,1893.78
TX8_P: CN2.2 R8.2 U8.1 U12.7 | length 405.7
  Top Layer w10: U12.7@2140.51,1848.39 2192.76,1848.39 2196.55,1852.18 2233.89,1852.18 2236.83,1855.12 2274.96,1855.12 2290.16,1839.92 R8.2@2305,1839.92 2319.84,1839.92 2330.92,1851 2342.46,1851 2358.46,1867 2423,1867 CN2.2@2435,1855
  Bottom Layer w10: CN2.2@2435,1855 2450.31,1870.31 2484.31,1870.31 2485,1871 2493.72,1871 2498.5,1866.22 U8.1@2512.36,1866.22
TX9_ISO_N: CN7.8 R25.1 U29.15 U33.1 | length 421.9
  Top Layer w10: CN7.8@1535,2075 1550.32,2059.68 1584.32,2059.68 1585,2059 1589.08,2059 1600.16,2070.08 R25.1@1615,2070.08 1629.84,2070.08 1639.92,2060 1684.54,2060 1692,2067.46 1692,2092.46 1738.54,2139 1773.45,2139 1777.24,2142.8 U29.15@1829.49,2142.8
  Bottom Layer w10: U33.1@1482.64,2058.78 1496.5,2058.78 1501.28,2054 1505,2054 1526,2075 CN7.8@1535,2075
TX9_ISO_P: CN7.9 R25.2 U29.16 U33.2 | length 418.5
  Top Layer w10: CN7.9@1535,2025 1550.32,2040.32 1584.31,2040.32 1585,2041 1589.08,2041 1600.16,2029.92 R25.2@1615,2029.92 1629.84,2029.92 1641.92,2042 1692,2042 1710,2060 1710,2085 1746,2121 1773.45,2121 1777.24,2117.2 U29.16@1829.49,2117.2
  Bottom Layer w10: U33.2@1482.64,2031.22 1496.5,2031.22 1501.28,2036 1524,2036 CN7.9@1535,2025
TX9_N: CN5.8 R17.1 U21.2 U29.6 | length 431.8
  Top Layer w10: U29.6@2140.51,2142.8 2192.76,2142.8 2196.55,2139 2224.08,2139 2235.16,2150.08 R17.1@2250,2150.08 2261.08,2139 2272.46,2139 2353.46,2058 2413.04,2058 2414.73,2059.68 2419.68,2059.68 CN5.8@2435,2075
  Bottom Layer w10: CN5.8@2435,2075 2450.32,2059.68 2484.32,2059.68 2485,2059 2493.72,2059 2498.5,2063.78 U21.2@2512.36,2063.78
TX9_P: CN5.9 R17.2 U21.1 U29.5 | length 431
  Top Layer w10: U29.5@2140.51,2117.2 2192.76,2117.2 2196.55,2121 2224.08,2121 2235.16,2109.92 R17.2@2250,2109.92 2261.08,2121 2265,2121 2346,2040 2420,2040 CN5.9@2435,2025
  Bottom Layer w10: CN5.9@2435,2025 2450.32,2040.32 2484.32,2040.32 2485,2041 2493.72,2041 2498.5,2036.22 U21.1@2512.36,2036.22
TX10_ISO_N: CN7.6 R26.1 U29.13 U34.1 | length 387
  Top Layer w10: CN7.6@1535,2175 1550.32,2159.68 1579.32,2159.68 1580,2159 1589.08,2159 1600.16,2170.08 R26.1@1615,2170.08 1629.84,2170.08 1639.92,2160 1674.54,2160 1704.73,2190.18 1773.45,2190.18 1777.24,2193.98 U29.13@1829.49,2193.98
  Bottom Layer w10: U34.1@1482.64,2158.78 1496.5,2158.78 1501.28,2154 1505,2154 1526,2175 CN7.6@1535,2175
TX10_ISO_P: CN7.7 R26.2 U29.14 U34.2 | length 383.7
  Top Layer w10: CN7.7@1535,2125 1550.32,2140.32 1579.31,2140.32 1580,2141 1589.08,2141 1600.16,2129.92 R26.2@1615,2129.92 1629.84,2129.92 1641.92,2142 1682,2142 1712.18,2172.18 1773.45,2172.18 1777.24,2168.39 U29.14@1829.49,2168.39
  Bottom Layer w10: U34.2@1482.64,2131.22 1496.5,2131.22 1501.28,2136 1524,2136 CN7.7@1535,2125
TX10_N: CN5.6 R18.1 U22.2 U29.8 | length 413
  Top Layer w10: U29.8@2140.51,2193.98 2192.76,2193.98 2196.55,2190.18 2226.43,2190.18 2229.37,2193.12 2270.63,2193.12 2273.57,2190.18 2280.26,2190.18 2290.16,2200.08 R18.1@2305,2200.08 2319.84,2200.08 2330.92,2189 2347.46,2189 2378.46,2158 2385,2158 2386.68,2159.68 2419.68,2159.68 CN5.6@2435,2175
  Bottom Layer w10: CN5.6@2435,2175 2450.32,2159.68 2474.32,2159.68 2475,2159 2493.72,2159 2498.5,2163.78 U22.2@2512.36,2163.78
TX10_P: CN5.7 R18.2 U22.1 U29.7 | length 413.2
  Top Layer w10: U29.7@2140.51,2168.39 2192.76,2168.39 2196.55,2172.18 2233.89,2172.18 2236.83,2175.12 2263.17,2175.12 2278.37,2159.92 R18.2@2305,2159.92 2319.84,2159.92 2330.92,2171 2340,2171 2371,2140 2420,2140 CN5.7@2435,2125
  Bottom Layer w10: CN5.7@2435,2125 2450.32,2140.32 2474.32,2140.32 2475,2141 2493.72,2141 2498.5,2136.22 U22.1@2512.36,2136.22
TX11_ISO_N: CN7.3 R27.1 U30.15 U35.1 | length 537.2
  Top Layer w10: CN7.3@1540,2330 1546.57,2330 1580.59,2295.98 1580.59,2289.41 1581,2289 1590,2289 ; 1594.08,2289 1605.16,2300.08 R27.1@1615,2300.08 1629.84,2300.08 1639.92,2290 1685,2290 1695,2300 1695,2426.46 1727.54,2459 1773.45,2459 1777.24,2462.8 U30.15@1829.49,2462.8
  Bottom Layer w10: U35.1@1482.64,2283.78 1487.64,2278.78 1494.41,2278.78 1494.41,2290.98 1518.43,2315 CN7.3@1535,2315
TX11_ISO_P: CN7.5 R27.2 U30.16 U35.2 | length 522.6
  Top Layer w10: CN7.5@1540,2230 1546.57,2230 1580.59,2264.02 1580.59,2270.59 1581,2271 1590,2271 ; 1594.08,2271 1605.16,2259.92 R27.2@1615,2259.92 1629.84,2259.92 1641.92,2272 1692.46,2272 1715,2294.54 1715,2421 1735,2441 1773.45,2441 1777.24,2437.2 U30.16@1829.49,2437.2
  Bottom Layer w10: U35.2@1482.64,2256.22 1497.21,2256.22 1518.43,2235 CN7.5@1535,2235
TX11_N: CN5.3 R19.1 U23.2 U30.6 | length 528.3
  Top Layer w10: U30.6@2140.51,2462.8 2192.76,2462.8 2196.55,2459 2224.08,2459 2235.16,2470.08 R19.1@2250,2470.08 2261.08,2459 2277.46,2459 2313,2423.46 2313,2337.46 2365.46,2285 2388.43,2285 2418.43,2315 CN5.3@2435,2315
  Bottom Layer w10: CN5.3@2435,2315 2451.57,2315 2477.79,2288.78 U23.2@2512.36,2288.78
TX11_P: CN5.5 R19.2 U23.1 U30.5 | length 529.2
  Top Layer w10: U30.5@2140.51,2437.2 2192.76,2437.2 2196.55,2441 2224.08,2441 2235.16,2429.92 R19.2@2250,2429.92 2261.08,2441 2270,2441 2295,2416 2295,2330 2358,2267 2386.43,2267 2418.43,2235 CN5.5@2435,2235
  Bottom Layer w10: CN5.5@2435,2235 2451.57,2235 2477.79,2261.22 U23.1@2512.36,2261.22
TX12_ISO_N: CN7.1 R28.1 U30.13 U36.1 | length 440
  Top Layer w10: CN7.1@1535,2425 1550.32,2409.68 1579.32,2409.68 1585,2404 1589.08,2404 1600.16,2415.08 R28.1@1615,2415.08 1629.84,2415.08 1640.92,2404 1645,2404 1654,2413 1654,2449 1715.18,2510.18 1773.45,2510.18 1777.24,2513.98 U30.13@1829.49,2513.98
  Bottom Layer w10: U36.1@1482.64,2413.78 1496.5,2413.78 1501.28,2409 1505,2409 1505.68,2409.68 1519.68,2409.68 CN7.1@1535,2425
TX12_ISO_P: CN7.2 R28.2 U30.14 U36.2 | length 435.3
  Top Layer w10: CN7.2@1535,2375 1546,2386 1589.08,2386 1600.16,2374.92 R28.2@1615,2374.92 1629.84,2374.92 1640.92,2386 1652.46,2386 1672,2405.54 1672,2441.54 1722.64,2492.18 1773.45,2492.18 1777.24,2488.39 U30.14@1829.49,2488.39
  Bottom Layer w10: U36.2@1482.64,2386.22 1496.5,2386.22 1500.59,2390.31 1519.69,2390.31 CN7.2@1535,2375
TX12_N: CN5.1 R20.1 U24.2 U30.8 | length 473.1
  Top Layer w10: U30.8@2140.51,2513.98 2192.76,2513.98 2196.55,2510.18 2226.43,2510.18 2229.37,2513.12 2270.63,2513.12 2273.57,2510.18 2280.26,2510.18 2290.16,2520.08 R20.1@2305,2520.08 2319.84,2520.08 2330.92,2509 2342.46,2509 2378,2473.46 2378,2422 2395,2405 2399.68,2409.68 2419.68,2409.68 CN5.1@2435,2425
  Bottom Layer w10: CN5.1@2435,2425 2447.22,2412.78 2493.72,2412.78 2498.5,2417.56 U24.2@2512.36,2417.56
TX12_P: CN5.2 R20.2 U24.1 U30.7 | length 473.9
  Top Layer w10: U30.7@2140.51,2488.39 2192.76,2488.39 2196.55,2492.18 2233.89,2492.18 2236.83,2495.12 2263.17,2495.12 2278.37,2479.92 R20.2@2305,2479.92 2319.84,2479.92 2330.92,2491 2335,2491 2360,2466 2360,2414.54 2399.54,2375 CN5.2@2435,2375
  Bottom Layer w10: CN5.2@2435,2375 2450.31,2390.31 2480.54,2390.31 2485,2394.78 2493.72,2394.78 2498.5,2390 U24.1@2512.36,2390
TX13_ISO_N: CN8.8 R29.1 U31.15 U37.1 | length 525
  Top Layer w10: CN8.8@1535,2595 1550.32,2579.68 1579.32,2579.68 1580,2579 1589.08,2579 1600.16,2590.08 R29.1@1615,2590.08 1629.84,2590.08 1639.92,2580 1654.54,2580 1697,2622.46 1697,2738.72 1737.28,2779 1773.45,2779 1777.24,2782.8 U31.15@1829.49,2782.8
  Bottom Layer w10: U37.1@1482.64,2578.78 1496.5,2578.78 1501.28,2574 1505,2574 1526,2595 CN8.8@1535,2595
TX13_ISO_P: CN8.9 R29.2 U31.16 U37.2 | length 521.7
  Top Layer w10: CN8.9@1535,2545 1550.32,2560.32 1579.31,2560.32 1580,2561 1589.08,2561 1600.16,2549.92 R29.2@1615,2549.92 1629.84,2549.92 1641.92,2562 1662,2562 1715,2615 1715,2731.26 1744.74,2761 1773.45,2761 1777.24,2757.2 U31.16@1829.49,2757.2
  Bottom Layer w10: U37.2@1482.64,2551.22 1496.5,2551.22 1501.28,2556 1524,2556 CN8.9@1535,2545
TX13_N: CN6.8 R21.1 U25.2 U31.6 | length 540.5
  Top Layer w10: U31.6@2140.51,2782.8 2192.76,2782.8 2196.55,2779 2224.08,2779 2235.16,2790.08 R21.1@2250,2790.08 2264.84,2790.08 2275.92,2779 2287.46,2779 2298,2768.46 2298,2672 2395,2575 2410,2575 2430,2595 CN6.8@2435,2595
  Bottom Layer w10: CN6.8@2435,2595 2450.32,2579.68 2469.32,2579.68 2470,2579 2493.72,2579 2498.5,2583.78 U25.2@2512.36,2583.78
TX13_P: CN6.9 R21.2 U25.1 U31.5 | length 537.2
  Top Layer w10: U31.5@2140.51,2757.2 2192.76,2757.2 2196.55,2761 2224.08,2761 2235.16,2749.92 R21.2@2250,2749.92 2264.84,2749.92 2275.92,2761 2280,2761 2280,2664.54 2387.54,2557 2423,2557 CN6.9@2435,2545
  Bottom Layer w10: CN6.9@2435,2545 2450.32,2560.32 2469.32,2560.32 2470,2561 2493.72,2561 2498.5,2556.22 U25.1@2512.36,2556.22
TX14_ISO_N: CN8.6 R30.1 U31.13 U38.1 | length 473.8
  Top Layer w10: CN8.6@1535,2695 1546,2684 1589.08,2684 1600.16,2695.08 R30.1@1615,2695.08 1629.84,2695.08 1639.92,2685 1650,2685 1652,2687 1652,2757.46 1724.73,2830.18 1773.45,2830.18 1777.24,2833.98 U31.13@1829.49,2833.98
  Bottom Layer w10: U38.1@1482.64,2678.78 1496.5,2678.78 1501.28,2674 1505,2674 1526,2695 CN8.6@1535,2695
TX14_ISO_P: CN8.7 R30.2 U31.14 U38.2 | length 474.7
  Top Layer w10: CN8.7@1535,2645 1550.32,2660.32 1569.31,2660.32 1575,2666 1589.08,2666 1600.16,2654.92 R30.2@1615,2654.92 1645.38,2654.92 1670,2679.54 1670,2750 1732.18,2812.18 1773.45,2812.18 1777.24,2808.39 U31.14@1829.49,2808.39
  Bottom Layer w10: U38.2@1482.64,2651.22 1496.5,2651.22 1501.28,2656 1524,2656 CN8.7@1535,2645
TX14_N: CN6.6 R22.1 U26.2 U31.8 | length 507.5
  Top Layer w10: U31.8@2140.51,2833.98 2192.76,2833.98 2196.55,2830.18 2226.43,2830.18 2229.37,2833.12 2270.63,2833.12 2273.57,2830.18 2290.1,2830.18 R22.1@2305,2845.08 2316.08,2834 2327.46,2834 2342,2819.46 2342,2743.46 2405.23,2680.23 2420.23,2680.23 CN6.6@2435,2695
  Bottom Layer w10: CN6.6@2435,2695 2446,2684 2493.72,2684 2498.5,2688.78 U26.2@2512.36,2688.78
TX14_P: CN6.7 R22.2 U26.1 U31.7 | length 509.5
  Top Layer w10: U31.7@2140.51,2808.39 2192.76,2808.39 2196.55,2812.18 2233.89,2812.18 2236.83,2815.12 2263.17,2815.12 2266.11,2812.18 2282.9,2812.18 2290.16,2804.92 R22.2@2305,2804.92 2316.08,2816 2320,2816 2324,2812 2324,2736 2415,2645 CN6.7@2435,2645
  Bottom Layer w10: CN6.7@2435,2645 2450.32,2660.32 2474.32,2660.32 2480,2666 2493.72,2666 2498.5,2661.22 U26.1@2512.36,2661.22
TX15_ISO_N: CN8.3 R31.1 U32.15 U39.1 | length 629
  Top Layer w10: CN8.3@1535,2845 1541.57,2845 1575.59,2810.98 1575.59,2804.41 1576,2804 1585,2804 ; 1589.08,2804 1600.16,2815.08 R31.1@1615,2815.08 1629.84,2815.08 1637.19,2807.73 1695,2865.53 1695,3055.46 1738.7,3099.16 1773.45,3099.16 1777.24,3102.95 U32.15@1829.49,3102.95
  Bottom Layer w10: U39.1@1482.64,2803.78 1487.64,2798.78 1494.41,2798.78 1494.41,2810.98 1518.43,2835 CN8.3@1535,2835
TX15_ISO_P: CN8.5 R31.2 U32.16 U39.2 | length 616.7
  Top Layer w10: CN8.5@1535,2745 1541.57,2745 1575.59,2779.02 1575.59,2785.59 1576,2786 1585,2786 ; 1589.08,2786 1600.16,2774.92 R31.2@1615,2774.92 1629.84,2774.92 1713,2858.08 1713,3048 1746.16,3081.16 1773.45,3081.16 1777.24,3077.36 U32.16@1829.49,3077.36
  Bottom Layer w10: U39.2@1482.64,2776.22 1497.21,2776.22 1518.43,2755 CN8.5@1535,2755
TX15_N: CN6.3 R23.1 U27.2 U32.6 | length 649.7
  Top Layer w10: U32.6@2140.51,3102.95 2192.76,3102.95 2196.55,3099.16 2224.24,3099.16 2235.16,3110.08 R23.1@2250,3110.08 2261.08,3099 2287.46,3099 2358,3028.46 2358,2907 2380,2885 2380,2814 2390,2804 2394,2804 2394.41,2804.41 2394.41,2810.98 2428.43,2845 CN6.3@2435,2845
  Bottom Layer w10: CN6.3@2435,2835 2451.57,2835 2479.01,2807.56 U27.2@2512.36,2807.56
TX15_P: CN6.5 R23.2 U27.1 U32.5 | length 648.8
  Top Layer w10: U32.5@2140.51,3077.36 2192.76,3077.36 2196.55,3081.16 2223.92,3081.16 2235.16,3069.92 R23.2@2250,3069.92 2264.84,3069.92 2275.92,3081 2280,3081 2340,3021 2340,2899.54 2362,2877.54 2362,2806.54 2382.54,2786 2394,2786 2394.41,2785.59 2394.41,2779.02 2428.43,2745 CN6.5@2435,2745
  Bottom Layer w10: CN6.5@2435,2755 2451.57,2755 2476.57,2780 U27.1@2512.36,2780
TX16_ISO_N: CN8.1 R32.1 U32.13 U40.1 | length 552.9
  Top Layer w10: CN8.1@1535,2945 1550.32,2929.68 1584.39,2929.68 1585,2929.08 1589.08,2929.08 1600.16,2940.16 R32.1@1615,2940.16 1629.84,2940.16 1640.92,2929.08 1645,2929.08 1645,3080 1715.34,3150.34 1773.45,3150.34 1777.24,3154.13 U32.13@1829.49,3154.13
  Bottom Layer w10: U40.1@1482.64,2933.78 1496.5,2933.78 1501.28,2929 1505,2929 1505.68,2929.68 1519.68,2929.68 CN8.1@1535,2945
TX16_ISO_P: CN8.2 R32.2 U32.14 U40.2 | length 552.4
  Top Layer w10: CN8.2@1535,2895 1550.31,2910.31 1584.24,2910.31 1585,2911.08 1589.08,2911.08 1600.16,2900 R32.2@1615,2900 1629.84,2900 1640.92,2911.08 1652.46,2911.08 1663,2921.62 1663,3072.54 1722.79,3132.34 1773.45,3132.34 1777.24,3128.54 U32.14@1829.49,3128.54
  Bottom Layer w10: U40.2@1482.64,2906.22 1496.5,2906.22 1500.59,2910.31 1519.69,2910.31 CN8.2@1535,2895
TX16_N: CN6.1 R24.1 U28.2 U32.8 | length 557.2
  Top Layer w10: U32.8@2140.51,3154.13 2192.76,3154.13 2196.55,3150.34 2226.59,3150.34 2229.37,3153.12 2270.63,3153.12 2273.41,3150.34 2280.42,3150.34 2290.16,3160.08 R24.1@2305,3160.08 2327.16,3137.92 2327.53,3137.92 2403,3062.46 2403,2937 2405,2935 2425,2935 CN6.1@2435,2945
  Bottom Layer w10: CN6.1@2435,2945 2446,2934 2493.72,2934 2498.5,2938.78 U28.2@2512.36,2938.78
TX16_P: CN6.2 R24.2 U28.1 U32.7 | length 558.8
  Top Layer w10: U32.7@2140.51,3128.54 2192.76,3128.54 2196.55,3132.34 2234.05,3132.34 2236.83,3135.12 2263.17,3135.12 2278.37,3119.92 R24.2@2305,3119.92 2320.08,3119.92 2385,3055 2385,2928.51 2403.2,2910.31 2419.69,2910.31 CN6.2@2435,2895
  Bottom Layer w10: CN6.2@2435,2895 2450.31,2910.31 2469.31,2910.31 2475,2916 2493.72,2916 2498.5,2911.22 U28.1@2512.36,2911.22
pads on no net: CN1.4 CN2.4 CN3.4 CN4.4 CN5.4 CN6.4 CN7.4 CN8.4 CN9.5 CN10.5 CN11.5 CN12.5 CN13.5 CN14.5 CN15.5 CN16.5 CN19.3 CN19.5 CN19.7 CN19.9 CN19.11 CN19.13 CN19.14 U84.7 U89.6 U90.6 U91.5 U92.5 U93.4 U94.3 U94.5 U94.8 U95.4 U96.3 U96.5 U96.8 U97.6 U98.6 U99.5 U100.5

## Polygon pours and split planes (outlines as drawn)
GND on Top Layer "gnd_top" (solid, remove dead copper, pour order 2): -5.43,5.3 -5.43,5125.3 2594.57,5125.3 2594.57,5.3
GND_ISO on Top Layer "gnd_iso_top" (solid, remove dead copper, pour order 4): 670,4790 1940,4790 1940,0 670,0
GND_ISO on Bottom Layer "gnd_iso_bottom" (solid, remove dead copper, pour order 8): 670,4795 1940,4795 1940,5 670,5
GND on Bottom Layer "gnd_bottom" (solid, remove dead copper, pour order 6): 0,0 0,5120 2600,5120 2600,0

## Silkscreen, mask and mechanical layers (free items; w line width, h text height)
Top Overlay:
  drawing of 388 lines, arcs and shapes, not listed
  text "ISO_SIMUCAM" at 715,9320 h100
  text "1_00 - Initial revision - Mar - 2018" at 2445,9190 h100
  text "CCB" at 485,9150 h100
  text "1_00" at 525,8810 h100
  text "TOP / BOTTOM: GND PLANE + SIGNALS" at 295,8470 h100
  text "2" at 1025,7580 h100
  text "1 oz / 1 oz" at 1415,7420 h100
  text "EXCEPT ON CN21 BORDERS, AS INDICATED IN GERBER" at 2675,6640 h100
  text "12V" at 555,5045 h40
  text "-" at 705,4935 h40
  text "+" at 815,4935 h40
  text "GND_ISO" at 770,4800 h40
  text "H" at 1129,3050 h40
  text "G" at 1459,2877 h40
  text "G" at 1128,2654 h40
  text "H" at 1458,2559 h40
  text "F" at 1129,2426 h40
  text "E" at 1459,2352 h40
  text "F" at 1456,2033 h40
  text "IMT - NSEE" at 1397,2025 h100 r90
  text "E" at 1130,2024 h40
  text "C" at 1459,1833 h40
  text "D" at 1131,1800 h40
  text "MAR/2018" at 1397,1549 h100 r90
  text "ISO_SIMUCAM 1.00" at 1296,1539 h100 r90
  text "D" at 1458,1515 h40
  text "C" at 1129,1407 h40
  text "A" at 1456,1326 h40
  text "B" at 1129,1175 h40
  text "B" at 1459,1043 h40
  text "TX" at 1487,845 h60
  text "A" at 1128,786 h40
  text "RX" at 1030,632 h60
Bottom Overlay:
  drawing of 397 lines, arcs and shapes, not listed
  text "H" at 255,2975 h40
  text "G" at 2385,2845 h40
  text "G" at 265,2685 h40
  text "H" at 2380,2605 h40
  text "F" at 265,2360 h40
  text "E" at 2380,2325 h40
  text "F" at 2380,2075 h40
  text "E" at 260,2065 h40
  text "C" at 2380,1815 h40
  text "D" at 260,1740 h40
  text "D" at 2375,1565 h40
  text "C" at 265,1450 h40
  text "A" at 2380,1280 h40
  text "B" at 255,1125 h40
  text "B" at 2375,1045 h40
  text "TX" at 2485,835 h60
  text "A" at 265,825 h40
  text "RX" at 235,615 h60
  text "ISO_SIMUCAM 1.00" at 1871,572 h100
  text "MAR/2018" at 1564,477 h100
  text "IMT - NSEE" at 1590,384 h100
board_outline:
  lines w6: 0,0 2600,0 2600,5120 0,5120 0,0
  lines w10: 0,3200 0,0 ; 0,4600 0,0 ; 2600,3200 2600,0 ; 2600,4600 2600,0 ; 0,0 2600,0 ; 0,0 2600,0

## Dimensions
0,0 to 2600,0 on Mechanical 13
0,0 to -20,5120 on Mechanical 13

## Text inside footprints (layer, text, board x,y; h text height)
CN19: Top Overlay "2" at 2534,816 h35 r90; Top Overlay "1" at 2430,820 h35 r90; Top Overlay "14" at 2530,25 h35 r90; Top Overlay "13" at 2425,25 h35 r90
fab1: Top Overlay "WITH EXPLICIT AUTHOR / RESPONSIBLE AUTHORIZATION" at 2479,5308 h100; Top Overlay "- GERBER MODIFICATIONS ARE ONLY ALLOWED" at 2418,5427 h100; Top Overlay "- ELECTRICAL TESTS ARE MANDATORY" at 2422,5625 h100; Top Overlay "- DIMENSIONAL TOLERANCE: +/- 0.2 mm" at 2429,5823 h100; Top Overlay "7. ADDITIONAL NOTES:" at 2364,6018 h100; Top Overlay "- IPC-6011 CLASS 2 / IPC-6012 CLASS 2 / IPC-A-600 CLASS 2" at 2429,6300 h100; Top Overlay "6. SPECIFIED STANDARDS:" at 2361,6472 h100; Top Overlay "- COVER VIAS WITH SOLDER MASK ON BOTH SIDES" at 2433,6758 h100; Top Overlay "- IONIC CONTAMINATION AFTER SOLDERING: 14 ug NaCl / in2 MAX." at 2433,6930 h100; Top Overlay "- GREEN EPOXY THERMAL CURE OR PHOTO IMAGEABLE" at 2433,7117 h100; Top Overlay "- BOTH SIDES" at 2437,7292 h100; Top Overlay "5. SOLDER MASK:" at 2357,7464 h100; Top Overlay "- WHITE (THERMAL CURE EPOXY)" at 2438,7704 h100; Top Overlay "4. SILKSCREEN MASK:" at 2357,7893 h100; Top Overlay "- HOT AIR SOLDER LEVELING (HASL) - SnPb" at 142,5355 h100; Top Overlay "3. FINISHING:" at 35,5528 h100; Top Overlay "- Cu THICKNESS ON HOLE: 20 um + SnPb MIN." at 146,5795 h100; Top Overlay "- DISPLACEMENT: 0.1 mm MAX." at 144,5956 h100; Top Overlay "- NON PLATED HOLE TOLERANCE: +/- 0.1 mm" at 139,6131 h100; Top Overlay "- PLATED HOLE TOLERANCE: +/- 0.1 mm" at 139,6301 h100; Top Overlay "2. HOLE CHARACTERISTICS:" at 35,6478 h100; Top Overlay "- TD MIN.: 310 ºC" at 116,6763 h100; Top Overlay "- TG MIN.: 150 ºC" at 116,6945 h100; Top Overlay "- RAW MATERIAL: FR-4" at 106,7143 h100; Top Overlay "- Cu THICKNESS (FINISHED):" at 118,7423 h100; Top Overlay "- LAYER NUMBERS:" at 115,7582 h100; Top Overlay "- TOTAL THICKNESS: 1.0 mm +/- 0.1 mm" at 111,7737 h100; Top Overlay "1. LAMINATE SPECIFICATIONS:" at 19,7909 h100; Top Overlay "GENERAL NOTES:" at 25,8112 h100; Top Overlay "LAYER STACKUP:" at 33,8629 h100; Top Overlay "REVISIONS DESCRIPTION:" at 2312,9326 h100; Top Overlay "REVISION:" at 29,8804 h100; Top Overlay "CODE NUMBER:" at 25,8980 h100; Top Overlay "AUTHOR:" at 21,9155 h100; Top Overlay "BOARD TITLE:" at 25,9326 h100
U89: Mechanical 13 "*" at 2555.5,4508.5 h50 r270
U90: Mechanical 13 "*" at 245.5,4498.5 h50 r270
U97: Mechanical 13 "*" at 1780.5,4163.5 h50 r270
U98: Mechanical 13 "*" at 1165.5,4163.5 h50 r270